# Altium PCB Müh Tas - 1.PcbDoc
Units mm, origin at the board's own origin, x right, y up, seen from the top; angles counter-clockwise.
Board outline 100.46 x 50.55 mm, 2 copper layers (Top Layer, Bottom Layer); 21 components, 19 nets, 80 pads, 26 vias.
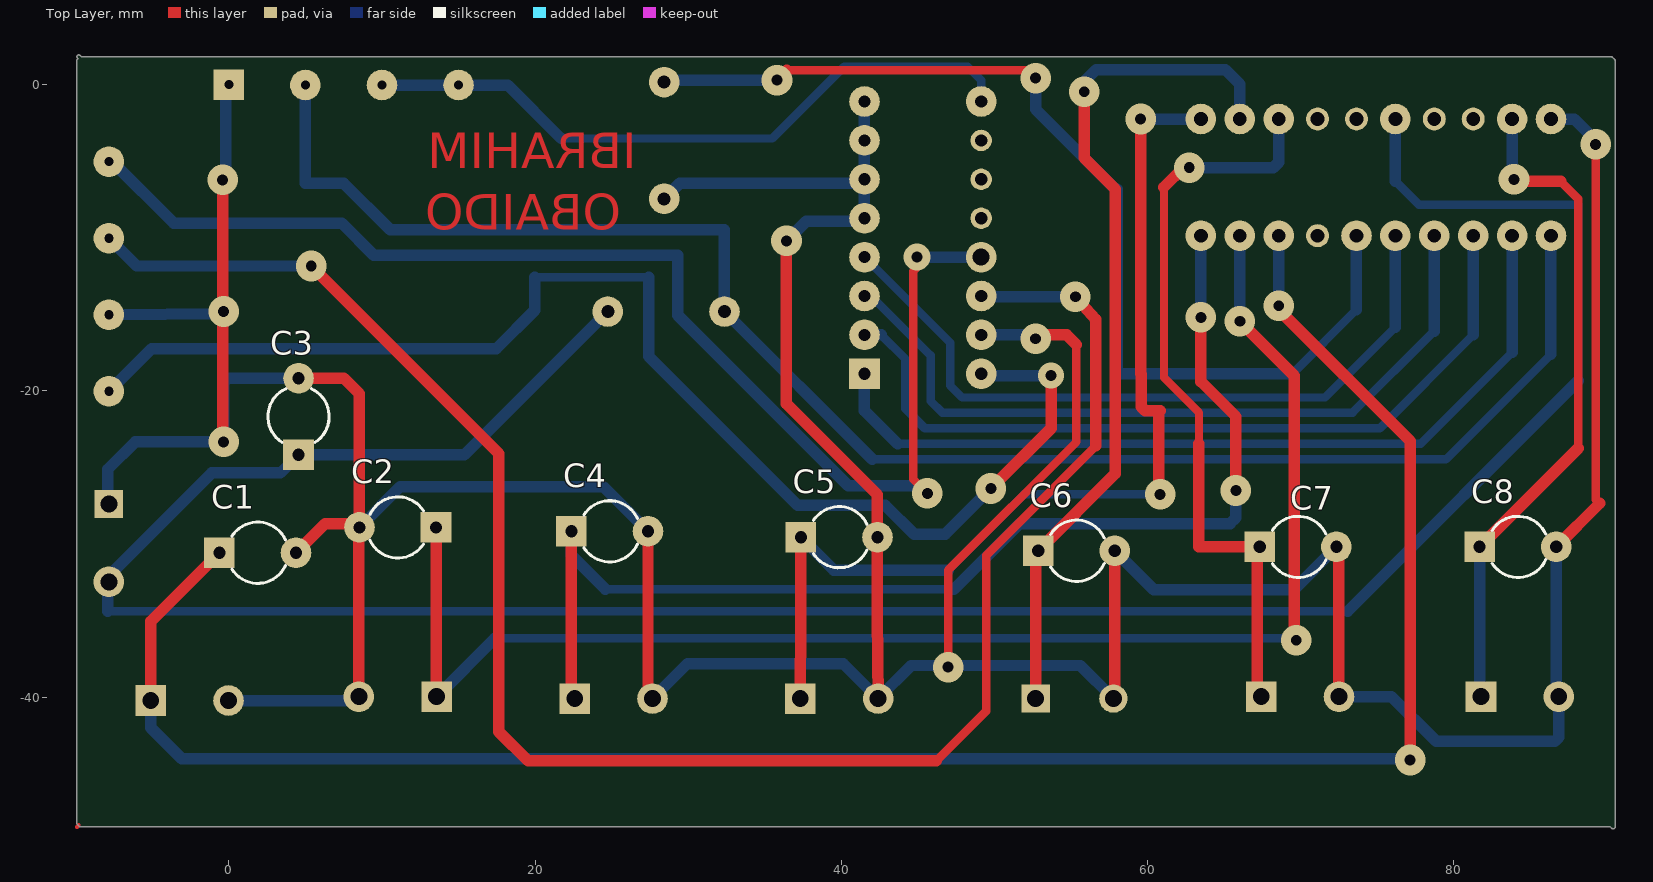
[diagram p0: Top Layer view]
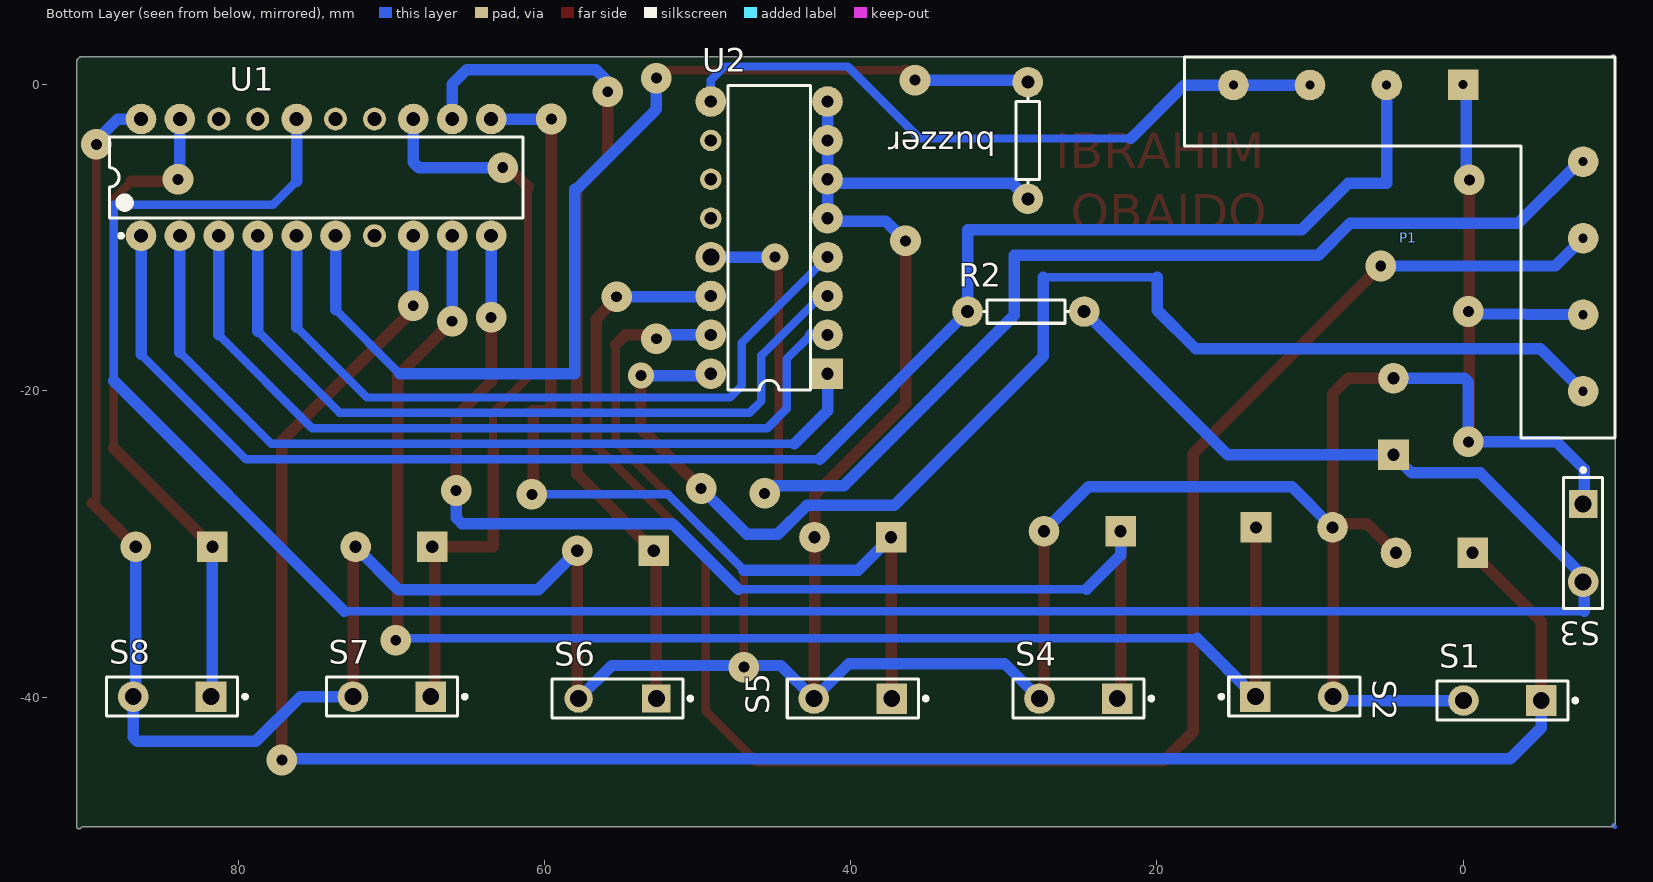
[diagram p1: Bottom Layer view, seen from below]

## Layer stack, top to bottom
Top Solder: solder mask 0.0102, Solder Resist, Dk 3.5
Top Layer: signal copper 0.0356
Dielectric 1: dielectric 0.32, FR-4, Dk 4.8
Bottom Layer: signal copper 0.0356
Bottom Solder: solder mask 0.0102, Solder Resist, Dk 3.5

## Board outline
-9.889,-48.315 cw(c-9.8,-48.225) -9.927,-48.225 -9.927,1.559 cw(c-9.8,1.559) -9.845,1.679 -9.89,1.723 cw(c-9.8,1.813) -9.71,1.904 -9.62,1.814 90.276,1.814 cw(c90.276,1.686) 90.367,1.776 90.366,1.777 90.493,1.65 cw(c90.403,1.559) 90.531,1.559 90.531,-48.479 cw(c90.403,-48.479) 90.313,-48.568 90.313,-48.569 90.224,-48.479 -9.673,-48.479 cw(c-9.673,-48.352) -9.763,-48.441 -9.763,-48.442

## Design rules (kind name [scope] priority, off if disabled: settings)
Clearance [All] p1: gap=0.254 ignorepadtopadclearanceinfootprint=FALSE except(0: Arc-Hole Track-Hole SMDPad-Hole THPad-Hole Via-Hole Fill-Hole Poly-Hole Region-Hole Text-Hole)
PolygonConnect [All] p1: connectstyle=Relief reliefconductorwidth=0.254 reliefentries=4 polygonreliefangle="90 Angle" airgapwidth=0.254
RoutingVias [All] p1: holewidth=0.711 width=1.27 viastyle="Through Hole" minholewidth=0.711 minwidth=1.27 maxholewidth=0.711 maxwidth=1.27
SolderMaskExpansion [All] p1: expansion=0.102 istentingtop=FALSE
Width [All] p1: maxlimit=0.95 minlimit=0.4 preferedwidth=0.75 toplayer_maxwidth=0.85 minimp=50.000000 maximp=50.000000 favimp=50.000000
30 further rules are at their usual default settings.

## Components (designator, comment, footprint, x,y, rotation, side; value= is the part's Value field where it differs from the comment)
buzzer "Res1" AXIAL-0.3 28.427,-3.648 r270 bottom (schematic designator R1)
C1 "Cap2" CAPR5-4X5 1.884,-30.572 r0 top value=0,1uF
C2 "Cap2" CAPR5-4X5 11.028,-28.921 r180 top value=0.1uF
C3 "Cap2" CAPR5-4X5 4.551,-21.682 r90 top value=0.1uF
C4 "Cap2" CAPR5-4X5 24.871,-29.175 r0 top value=0.1uF
C5 "Cap2" CAPR5-4X5 39.857,-29.556 r0 top
C6 "Cap2" CAPR5-4X5 55.351,-30.445 r0 top value=0.1uF
C7 "Cap2" CAPR5-4X5 69.829,-30.191 r0 top value=0.1uF
C8 "Cap2" CAPR5-4X5 84.18,-30.191 r0 top value=0.1uF
P1 "MHDR1X8" MHDR1X8 -7.833,-11.141 r270 bottom
R2 "Res1" AXIAL-0.3 28.554,-14.824 r0 bottom value=47K
S1 "SW-PB" SPST-2#1 -2.561,-40.224 r0 bottom
S2 "SW-PB" SPST-2#1 11.028,-39.97 r180 bottom
S3 "SW-PB" SPST-2#2 -7.834,-29.933 r270 bottom
S4 "SW-PB" SPST-2#1 25.125,-40.097 r0 bottom
S5 "SW-PB" SPST-2#1 39.857,-40.097 r0 bottom
S6 "SW-PB" SPST-2#3 55.224,-40.097 r0 bottom
S7 "SW-PB" SPST-2#1 69.956,-39.97 r0 bottom
S8 "SW-PB" SPST-2#1 84.307,-39.97 r0 bottom
U1 "MSP430G2553IN20" TI-N20 74.909,-6.061 r90 bottom
U2 "AM26LS31DC" 620-10 45.318,-9.998 r90 bottom

## Footprints (in the part's own frame and the unit in brackets; to place one, negate y for a bottom-side part, rotate by r counter-clockwise, add the part's x,y. Pads: shape width x height; smd on the part's side, far side on the other; paste and mask are expansions set on the pad)
620-10 [mm] "DIP; 16 Leads; Row Spacing 7.62 mm; Pitch 2.54 mm"
  rect 2x2 hole 0.8: 1(-8.89,-3.81)
  round 2 hole 0.8: 2(-6.35,-3.81) 3(-3.81,-3.81) 4(-1.27,-3.81) 5(1.27,-3.81) 6(3.81,-3.81) 7(6.35,-3.81) 8(8.89,-3.81) 9(8.89,3.81) 14(-3.81,3.81) 15(-6.35,3.81) 16(-8.89,3.81)
  round 1.4 hole 0.8: 10(6.35,3.81) 11(3.81,3.81) 12(1.27,3.81)
  round 2 hole 1.1: 13(-1.27,3.81)
  silkscreen extent -9.95,-2.7 9.95,2.7
AXIAL-0.3 [mm] "Axial Device, Thru-Hole; 2 Leads; 0.3 in Pin Spacing"
  round 2 hole 0.85: 1(-3.81,0) 2(3.81,0)
  silkscreen extent -2.77,-0.76 2.77,0.76
CAPR5-4X5 [mm] "Capacitor; 2 Leads"
  rect 2x2 hole 0.8: 1(-2.5,0)
  round 2 hole 0.8: 2(2.5,0)
  silkscreen extent -1.69,-2 1.82,2
MHDR1X8 [mm] "Connector; Header; 8 Position"
  rect 2x2 hole 0.6: 1(-11.141,-7.833)
  round 2 hole 0.6: 2(-11.11,-12.833) 3(-11.11,-17.833) 4(-11.11,-22.833) 5(-6.11,0) 6(-1.11,0) 7(3.89,0) 8(8.89,0)
  silkscreen extent -12.95,-26.04 11.95,2.09
SPST-2#1 [mm] "Switch; 2 Leads"
  rect 2x2 hole 1.1: 1(-2.54,0)
  round 2 hole 1.1: 2(2.54,0)
  silkscreen extent -4.89,-1.27 4.28,1.27
SPST-2#2 [mm] "Switch; 2 Leads"
  rect 1.85x1.85 hole 1.1: 1(-2.54,0)
  round 2 hole 1.1: 2(2.54,0)
  silkscreen extent -4.89,-1.27 4.28,1.27
SPST-2#3 [mm] "Switch; 2 Leads"
  rect 1.85x1.85 hole 1.1: 1(-2.54,0)
  round 1.85 hole 1.1: 2(2.54,0)
  silkscreen extent -4.89,-1.27 4.28,1.27
TI-N20 [mm] "DIP, 20-Leads, Body 25.4x6.35 mm, Pitch 2.54 mm"
  round 2 hole 0.9: 1(-3.81,11.43) 2(-3.81,8.89) 3(-3.81,6.35) 4(-3.81,3.81) 5(-3.81,1.27) 6(-3.81,-1.27) 8(-3.81,-6.35) 9(-3.81,-8.89) 10(-3.81,-11.43) 11(3.81,-11.43) 12(3.81,-8.89) 13(3.81,-6.35) 16(3.81,1.27) 19(3.81,8.89) 20(3.81,11.43)
  round 1.5 hole 0.9: 7(-3.81,-3.81) 14(3.81,-3.81) 15(3.81,-1.27) 17(3.81,3.81) 18(3.81,6.35)
  silkscreen extent -3.93,-13.5 2.65,13.5, body extent -3.95,-13.45 3.95,13.45, height 5.08

## Part data
buzzer R2: "Resistor", LatestRevisionDate=17-Jul-2002, LatestRevisionNote="Re-released for DXP Platform.", PackageDescription="Axial Device, Thru-Hole; 2 Leads; 0.3 in Pin Spacing", PackageReference=AXIAL-0.3, Published=8-Jun-2000, Publisher="Altium Limited"
C1 C2 C3 C4 C5 C6 C7 C8: "Capacitor", PackageDescription="Capacitor; 2 Leads", PackageReference=CAPR5-4X5, Published=23-Sep-2002, Publisher="Altium Limited"
P1: "Header, 8-Pin", LatestRevisionDate=17-Jul-2002, LatestRevisionNote="Re-released for DXP Platform.", Publisher="Altium Limited"
S1 S2 S3 S4 S5 S6 S7 S8: "Switch", LatestRevisionDate=17-Jul-2002, LatestRevisionNote="Re-released for DXP Platform.", PackageDescription="Switch; 2 Leads", PackageReference=SPST-2, Published=24-Mar-1999, Publisher="Altium Limited"
U1: "16 MHz Mixed Signal Microcontroller with 16 KB Flash, 512 B SRAM and 24 GPIOs, -40 to 85 degC, 20-pin DIP (N), Pb-Free (RoHS)", Frequency(MHz)=16, Manufacturer="Texas Instruments", Supplier Part Number 1=MSP430G2533IRHB32T-ND, Temp Sensor=Yes, ADC="10-bit SAR", ADC Channels=8, Brown Out Reset=Yes, Cap touch I/O=Yes, Code_JEDEC=MS-001, Comparators=Yes, ComponentLink1Description="Manufacturer URL", ComponentLink1URL=http://www.ti.com/, ComponentLink2Description=Datasheet, ComponentLink2URL=http://www.ti.com/general/docs/lit/getliterature.tsp?genericPartNumber=MSP430G2553&fileType=pdf, ComponentLink3Description="Package Specification", ComponentLink3URL=http://www.ti.com/litv/pdf/mpds177g, DatasheetVersion=SLAS735G, Eco-Plan="Pb-Free (RoHS)", Flash(KB)=16, GPIO=24, Mounting Technology="Through Hole", PackageDescription="20-Pin Plastic In-Line, Body 25.40 x 6.35 mm, Pitch 2.54 mm", PackageReference=N20, PackageVersion=4040049/E, PartNumber=MSP430G2553IN20, SRAM(B)=512, SubFamily="Value Line", Supplier 1=Digi-Key, Supplier 2=Mouser, Supplier Part Number 2=595-P430G2533IRHB32T, Timers - 16-bit=2, USCI_A (UART/LIN/IrDA/SPI)=1, USCI_B (I2C & SPI)=1, Watchdog=Yes
U2: "Quad EIA-422 Line Driver with Three-State Output", ComponentLink1Description="Manufacturer Link", ComponentLink1URL=http://www.onsemi.com/site/products/parametrics/0,4446,178,00.html, DatasheetVersion=1988, LatestRevisionDate=06-Jun-2005, LatestRevisionNote="Stylized 3D Model Added", PackageDescription="DIP; 16 Leads; Row Spacing 7.62 mm; Pitch 2.54 mm", PackageReference=620-10, Published=17-Jul-2002, Publisher="Altium Limited"

## Via types
v1: diameter 2, hole 0.711, Top Layer to Bottom Layer, 24 vias
v2: diameter 1.75, hole 0.711, Top Layer to Bottom Layer, 1 vias
v3: diameter 1.7, hole 0.711, Top Layer to Bottom Layer, 1 vias

## Nets (pads, with @x,y where several pads share a name; then routed paths per layer and width w, separated by ;. In a path a pad name is that pad's centre, name@x,y a point inside that pad or via, vN(x,y) a via of type N, cw(c..) or ccw(c..) an arc to the next point about the centre after c; other vN are vias at no path point)
+5: P1.3 P1.4 U2.9 | length 44.3
  Bottom Layer w0.55: 21.696,-3.521 35.489,-3.521 40.188,1.178 48.239,1.178 49.128,0.289 U2.9
  Bottom Layer w0.75: P1.3 P1.4 18.206,-0.031 21.696,-3.521
GND: buzzer.2 C1.2 C2.2 C3.2 C4.2 C5.2 C6.2 C7.2 C8.2 P1.1 P1.7 S1.2 S2.2 S3.1 S4.2 S5.2 S6.2 S7.2 S8.2 U1.20 U2.5 U2.6 U2.7 U2.8 U2.15 | length 340.7
  Top Layer w0.55: v1(46.969,-38.047) 46.969,-31.715 55.351,-23.333 55.351,-16.983 ; v1(89.26,-3.902) 89.26,-27.103 89.514,-27.357
  Top Layer w0.75: v1(-0.41,-6.224) -0.41,-23.269 v1(-0.342,-23.337) ; C1.2 6.289,-28.667 7.847,-28.667 8.315,-29.134 C2.2@8.488,-28.96 ; C3.2 7.512,-19.181 8.528,-20.197 C2.2 C2.2@8.488,-28.96 ; S2.2@8.234,-39.97 S2.2@8.234,-39.968 ; S2.2 C2.2@8.488,-28.96 ; C4.2 27.371,-39.831 S4.2 ; v1(36.416,-10.21) 36.416,-20.85 42.357,-26.792 C5.2 42.357,-34.799 S5.2 ; v1@52.811,-16.348 54.716,-16.348 55.351,-16.983 ; S6.2 57.851,-40.009 C6.2 ; C7.2 72.496,-30.357 S7.2 ; C8.2 89.514,-27.357
  Bottom Layer w0.75: S3.1@-7.895,-27.393 -7.895,-25.111 -6.121,-23.337 v1(-0.342,-23.337) -0.342,-19.448 -0.075,-19.181 C3.2 ; P1.7 v1@-0.341,-14.972 ; v1(-0.41,-6.224) -0.205,-6.019 -0.205,-0.205 P1.1 ; S1.2 8.234,-40.224 S2.2 ; C2.2@8.401,-29.048 C2.2 11.195,-26.254 24.45,-26.254 C4.2 ; S4.2 29.951,-37.811 40.111,-37.811 S5.2 44.556,-37.938 55.605,-37.938 S6.2 ; buzzer.2 29.443,-6.442 41.254,-6.442 U2.6 ; v1(36.416,-10.21) 37.698,-8.928 41.308,-8.928 U2.5 U2.6 ; U2.8 U2.7 U2.6 ; U2.15 v1@52.811,-16.348 ; C6.2 60.391,-32.985 69.535,-32.985 C7.2 ; S7.2 75.925,-39.97 78.846,-42.891 86.593,-42.891 86.847,-42.637 S8.2 86.68,-39.803 C8.2 ; U1.20 87.863,-2.251 89.26,-3.648 v1(89.26,-3.902)
  other v1: 52.684,-16.602 -0.342,-14.824
Netbuzzer_1: buzzer.1 U1.6 | length 68.6
  Top Layer w0.55: v1@36.428,0.924 52.176,0.924 v1(52.684,0.416)
  Top Layer w0.75: v1(35.793,0.289) v1@36.428,0.924
  Bottom Layer w0.55: 69.448,-18.888 73.639,-14.697
  Bottom Layer w0.75: buzzer.1 28.554,0.289 v1(35.793,0.289) ; v1(52.684,0.416) 52.684,-1.616 57.891,-6.823 58.018,-6.823 58.018,-18.888 69.448,-18.888 ; 73.639,-14.697 U1.6
NetC1_1: C1.1 S1.1 U1.8 | length 134.2
  Top Layer w0.75: S1.1 -5.101,-35.056 C1.1 ; v1@68.559,-14.697 77.144,-23.281 v1(77.144,-44.112)
  Bottom Layer w0.75: S1.1 -5.101,-42.002 -3.069,-44.034 77.065,-44.034 v1(77.144,-44.112) ; v1@68.559,-14.697 v1(68.559,-14.443) U1.8
NetC2_1: C2.1 S2.1 U1.9 | length 96.1
  Top Layer w0.75: C2.1 13.528,-39.93 S2.1 ; v1(66.019,-15.459) 69.575,-19.015 v1@69.575,-35.652
  Bottom Layer w0.55: 17.378,-36.16 v1@69.499,-36.16
  Bottom Layer w0.75: S2.1 17.378,-36.16 ; v1(66.019,-15.459) U1.9 ; v1@69.499,-36.16 v1@69.702,-36.363
  other v1: 69.702,-36.287
NetC3_1: C3.1 R2.1 S3.2 U1.16 | length 172.4
  Bottom Layer w0.55: -7.895,-34.382 73.081,-34.382 ; 76.179,-6.315 77.703,-7.839 88.117,-7.839 88.117,-19.345
  Bottom Layer w0.75: -7.895,-34.382 -7.895,-32.146 -1.113,-25.365 3.368,-25.365 C3.1 15.386,-24.182 R2.1 ; 73.081,-34.382 88.117,-19.345 ; 76.179,-6.315 U1.16
NetC4_1: C4.1 S4.1 U1.10 | length 78.5
  Top Layer w0.75: C4.1 22.371,-39.882 S4.1 ; v1@63.479,-15.078 v1(63.479,-15.205) 63.479,-19.396 65.765,-21.682 65.765,-26.254 65.511,-26.508 v1(65.765,-26.508)
  Bottom Layer w0.55: 24.592,-32.959 47.348,-32.959
  Bottom Layer w0.75: C4.1 22.371,-30.738 24.592,-32.959 ; 47.348,-32.959 51.641,-28.667 65.384,-28.667 65.765,-28.286 v1(65.765,-26.508) ; v1@63.479,-15.078 U1.10
NetC5_1: C5.1 S5.1 U1.11 | length 66.6
  Top Layer w0.75: S5.1 37.357,-34.799 C5.1 ; v1(59.542,-2.251) 59.542,-18.888 59.577,-18.922 59.577,-21.047 59.838,-21.308 60.812,-21.308 60.712,-21.408 60.712,-26.662 v1(60.812,-26.762)
  Bottom Layer w0.55: 46.969,-31.715 51.922,-26.762 v1(60.812,-26.762)
  Bottom Layer w0.75: C5.1 39.516,-31.715 46.969,-31.715 ; v1(59.542,-2.251) U1.11
NetC6_1: C6.1 S6.1 U1.12 | length 56.5
  Top Layer w0.75: S6.1 52.684,-30.611 C6.1 57.891,-25.404 57.891,-6.823 55.86,-4.791 v1(55.86,-0.468)
  Bottom Layer w0.75: v1(55.86,-0.468) 55.86,0.201 56.639,0.979 65.076,0.979 66.019,0.035 U1.12
NetC7_1: C7.1 S7.1 U1.13 | length 49.4
  Top Layer w0.55: 61.066,-6.696 61.066,-19.142 63.352,-21.428 63.352,-23.46
  Top Layer w0.75: 61.066,-6.696 v1@62.336,-5.426 ; 63.352,-23.46 63.352,-30.191 C7.1 67.162,-30.357 67.162,-39.716 S7.1
  Bottom Layer w0.75: v1@62.336,-5.426 v1(62.717,-5.426) 68.199,-5.426 68.559,-5.066 U1.13
NetC8_1: C8.1 S8.1 U1.19 | length 44.1
  Top Layer w0.55: 86.974,-6.315 88.117,-7.458 88.117,-23.753
  Top Layer w0.75: C8.1 88.117,-23.753 ; v1@83.799,-6.315 86.974,-6.315
  Bottom Layer w0.75: C8.1 81.68,-39.882 S8.1 ; v1@83.799,-6.315 U1.19
  other v1: 83.926,-6.188
NetP1_2: P1.2 R2.2 U1.1 | length 108.9
  Bottom Layer w0.55: 42.016,-24.476 79.481,-24.476 86.339,-17.618
  Bottom Layer w0.75: P1.2 5,-6.442 7.492,-6.442 10.54,-9.49 32.364,-9.49 R2.2 42.016,-24.476 ; 86.339,-17.618 U1.1
NetP1_5: P1.5 U2.13 | length 84.7
  Top Layer w0.55: v2(44.94,-11.268) 44.94,-11.94 44.683,-12.197 44.683,-25.763 v1(45.619,-26.698)
  Bottom Layer w0.75: P1.5@-7.641,-5.005 -3.589,-9.056 7.382,-9.056 9.467,-11.141 29.316,-11.141 29.316,-15.065 40.45,-26.199 45.119,-26.199 v1(45.619,-26.698) ; v2(44.94,-11.268) U2.13
NetP1_6: P1.6 U2.14 | length 119.9
  Top Layer w0.55: 46.21,-44.161 49.458,-40.912 49.458,-30.75 56.621,-23.587
  Top Layer w0.75: v1(5.383,-11.848) 17.632,-24.097 17.632,-42.256 19.537,-44.161 46.21,-44.161 ; v1(55.281,-13.853) 56.621,-15.332 56.621,-23.587
  Bottom Layer w0.75: P1.6 -6.016,-11.848 v1(5.383,-11.848) ; U2.14@49.312,-13.853 v1(55.281,-13.853)
NetP1_8: P1.8 U2.16 | length 86.8
  Top Layer w0.75: v1(49.763,-26.381) 53.7,-22.444 v3@53.7,-19.015
  Bottom Layer w0.55: 19.981,-12.584 27.411,-12.584
  Bottom Layer w0.75: P1.8 -5.039,-17.236 17.477,-17.236 19.981,-14.733 19.981,-12.584 ; 27.411,-12.584 27.411,-17.739 37.157,-27.484 42.866,-27.484 44.751,-29.369 46.774,-29.369 v1(49.763,-26.381) ; U2.16 49.128,-19.009 v3(53.694,-19.009)
NetU1_2: U1.2 U2.1 | length 55.7
  Bottom Layer w0.55: 43.667,-23.46 77.83,-23.46 83.799,-17.491
  Bottom Layer w0.75: U2.1 41.508,-21.301 43.667,-23.46 ; 83.799,-17.491 U1.2
NetU1_3: U1.3 U2.2 | length 53.2
  Bottom Layer w0.55: 42.601,-16.348 44.175,-17.922 44.175,-21.174 45.445,-22.444 75.163,-22.444 81.259,-16.348
  Bottom Layer w0.75: U2.2 42.601,-16.348 ; 81.259,-16.348 U1.3
NetU1_4: U1.4 U2.3 | length 50.5
  Bottom Layer w0.55: U2.3@41.944,-13.808 45.826,-17.69 45.826,-20.666 46.588,-21.428 73.385,-21.428 78.719,-16.094
  Bottom Layer w0.75: U2.3 U2.3@41.944,-13.808 ; 78.719,-16.094 U1.4
NetU1_5: U1.5 U2.4 | length 48
  Bottom Layer w0.55: U2.4 47.096,-16.856 47.096,-19.65 47.881,-20.434 71.585,-20.434 76.179,-15.84
  Bottom Layer w0.75: 76.179,-15.84 U1.5
pads on no net: U1.7 U1.14 U1.15 U1.17 U1.18 U2.10 U2.11 U2.12

## Other copper
Top Layer:
  text "IBRAHIM /  OBAIDO" at 26.649,-10.252 h4
Multi-Layer:
  lines w0.254: -9.927,-48.479 -9.8,-48.352

## Silkscreen, mask and mechanical layers (free items; w line width, h text height)
Mechanical 1:
  text "X" at -9.292,-0.473 h2
  text "X" at 88.498,-0.727 h2
  text "X" at 88.498,-47.844 h2
  text "X" at -8.784,-47.971 h2